# Altium PCB PCB1.PcbDoc
Units mm, origin at the board's own origin, x right, y up, seen from the top; angles counter-clockwise.
Board outline 55.5 x 74.04 mm, 2 copper layers (Top Layer, Bottom Layer), stack 1.571 mm thick; 29 components, 50 nets, 134 pads, 18 vias.
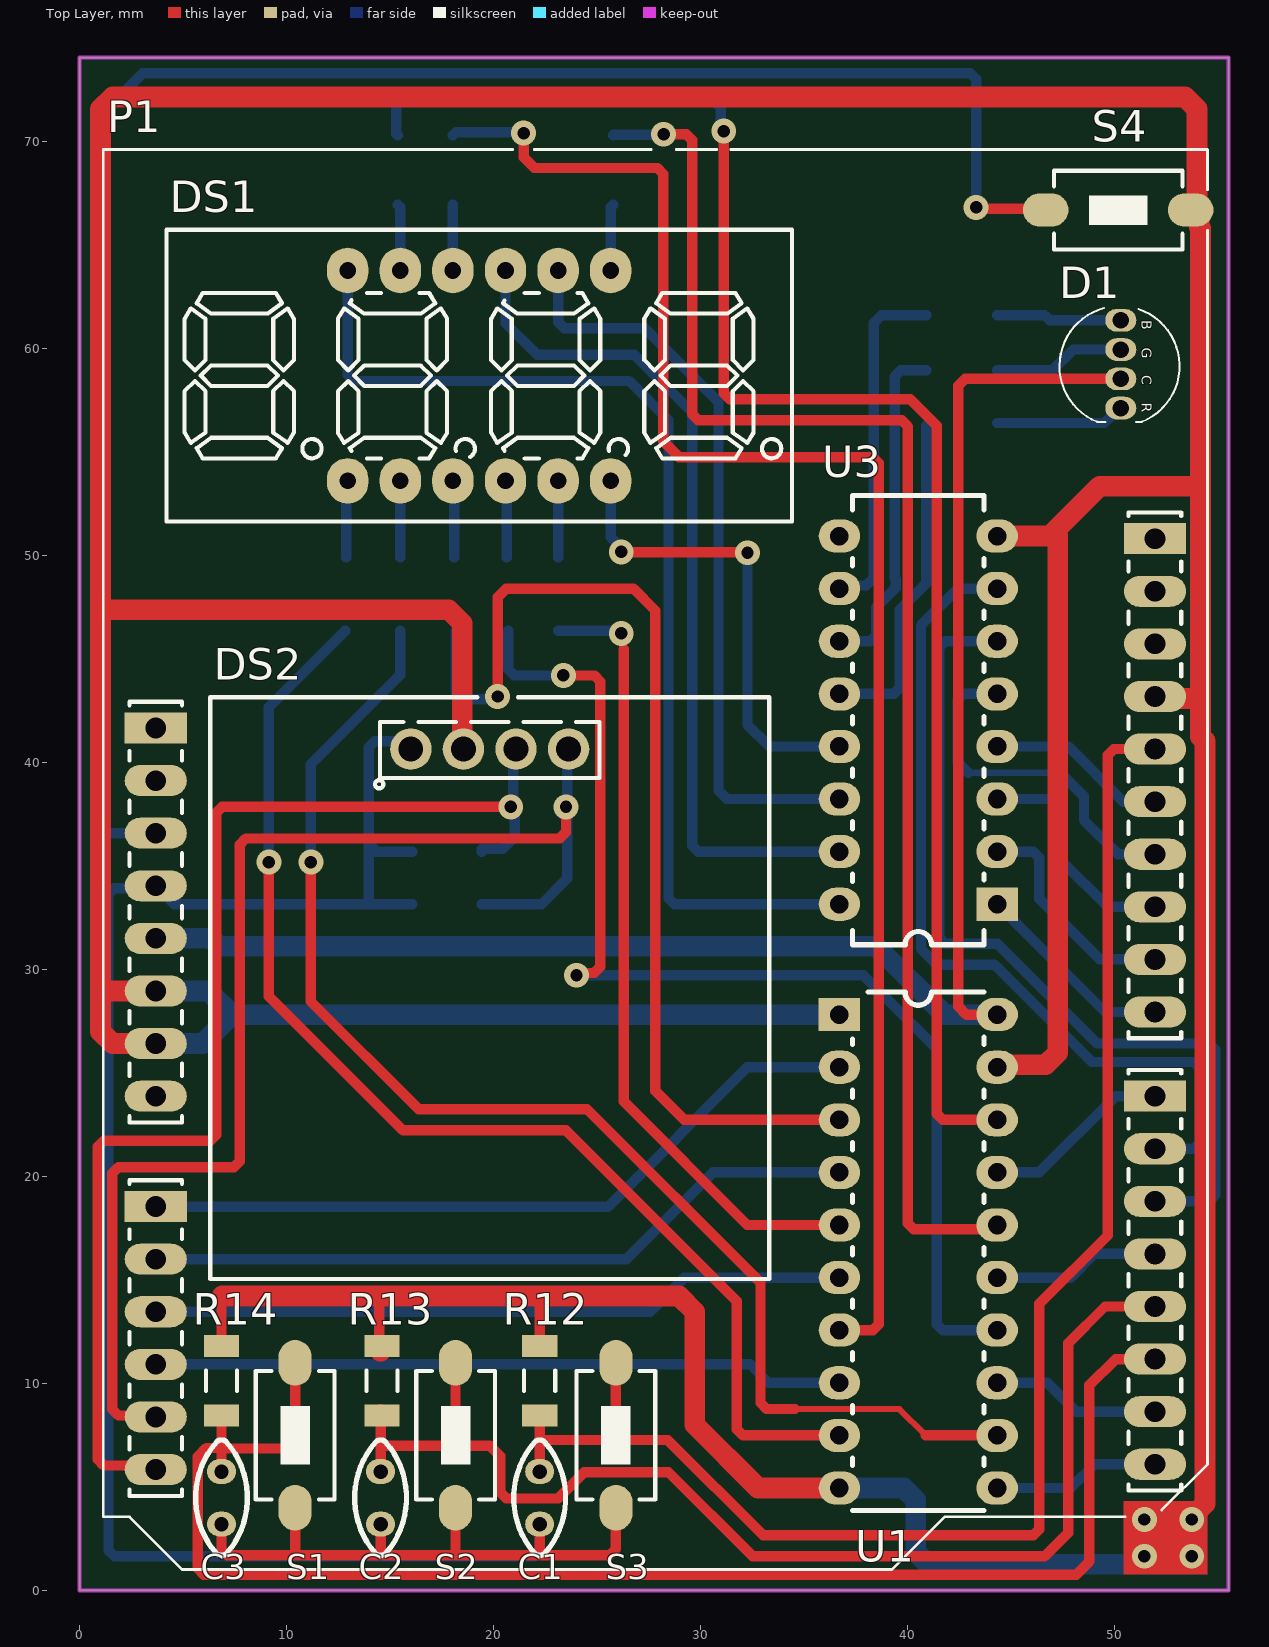
[diagram p0: Top Layer view]
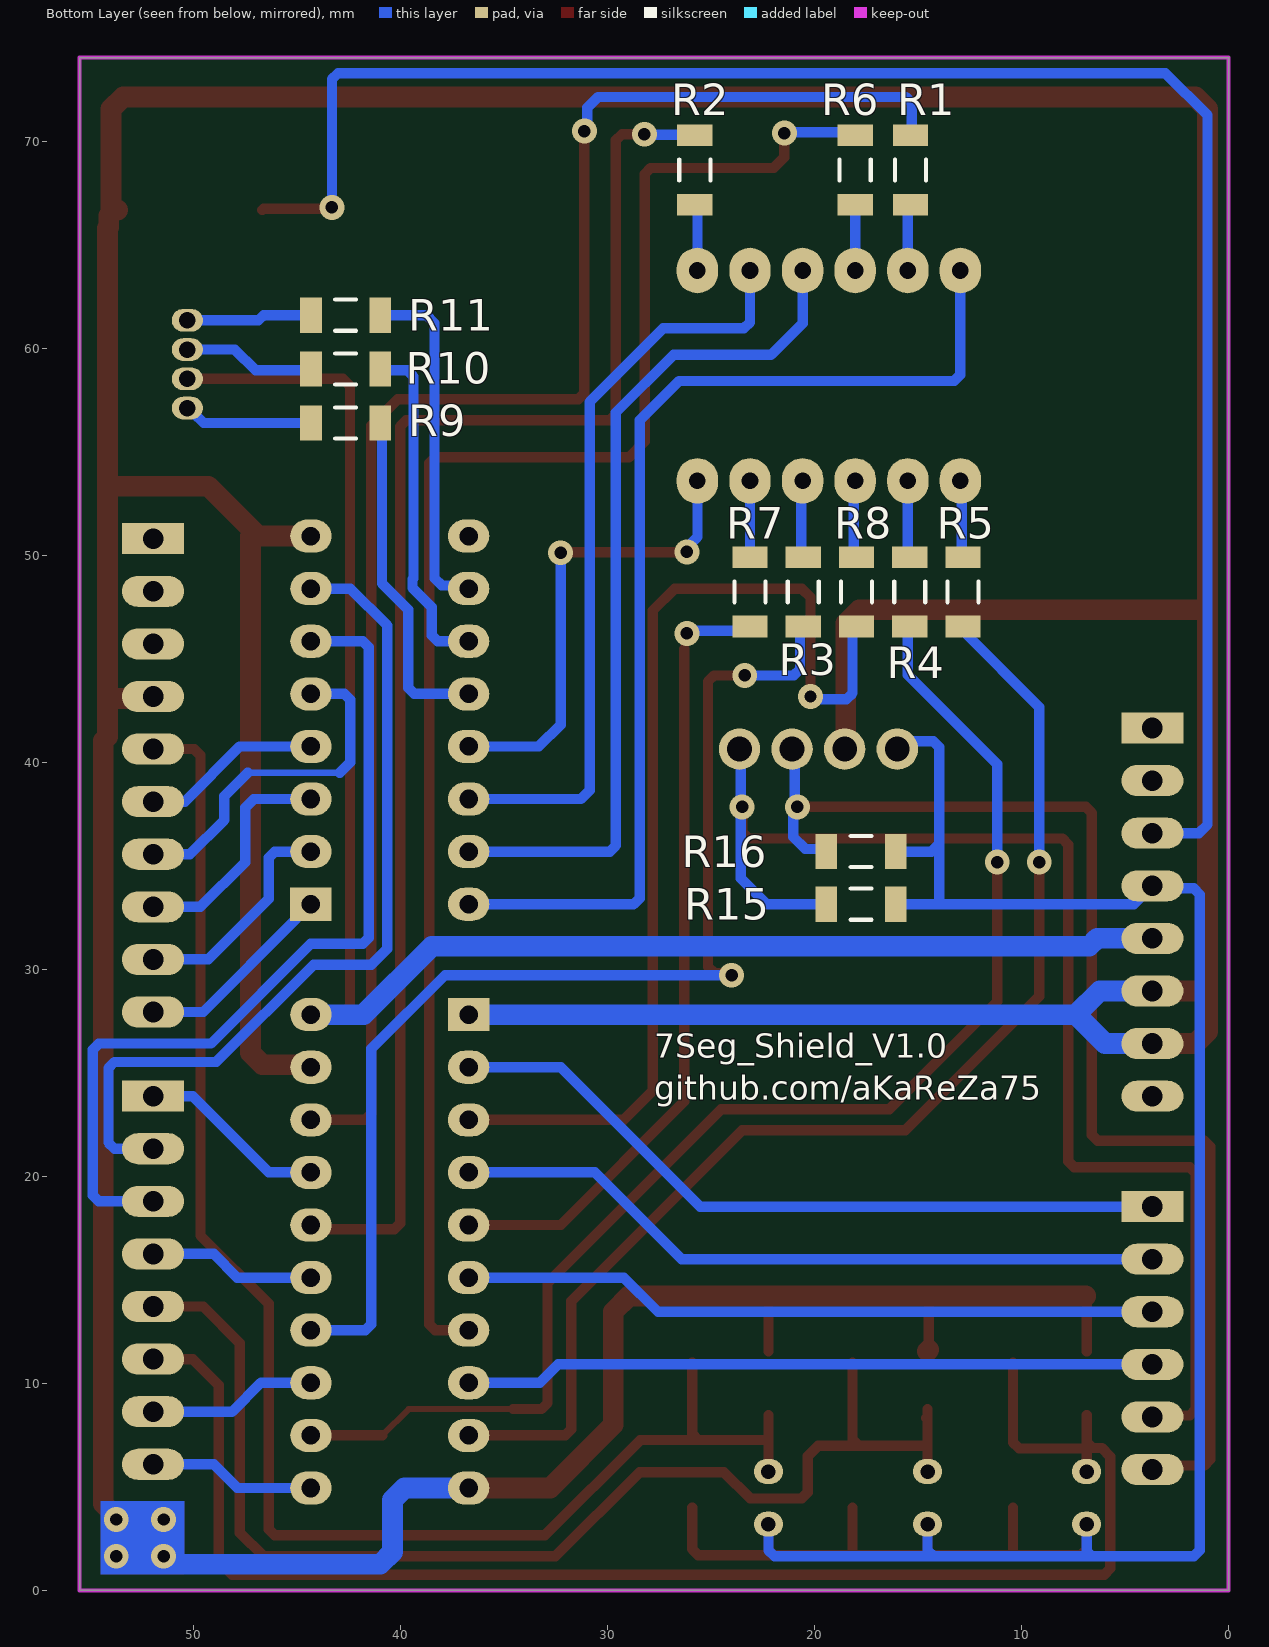
[diagram p1: Bottom Layer view, seen from below]

## Layer stack, top to bottom
Top Solder: solder mask 0.0102, Solder Resist, Dk 3.5
Top Layer: signal copper 0.0356
Dielectric 1: dielectric 1.5, FR-4, Dk 4.8
Bottom Layer: signal copper 0.0356
Bottom Solder: solder mask 0.0102, Solder Resist, Dk 3.5

## Board outline
0,0 55.499,0 55.499,74.041 0,74.041

## Design rules (kind name [scope] priority, off if disabled: settings)
AcuteAngle [All] p1: minimum=6.00000000000000E+0001 checktracksonly=TRUE
AssemblyTestPointUsage [All] p1 off:
AssemblyTestpoint [All] p1 off: testpointundercomponent=TRUE minsize=1.016 maxsize=2.54 preferedsize=1.524 minholesize=0 maxholesize=1.016 preferedholesize=0.813 testpointgrid=0.025 usegrid=TRUE gridtolerance=0 allowsidetop=TRUE allowsidebottom=TRUE
BoardOutlineClearance [All] p1: gap=0.2 ignorepadtopadclearanceinfootprint=FALSE
Clearance Poly_Clearance [All vs InPolygon] p1: gap=0.25 ignorepadtopadclearanceinfootprint=TRUE except(0.3: Arc-Hole Track-Hole SMDPad-Hole THPad-Hole Via-Hole Fill-Hole Poly-Hole Region-Hole Text-Hole)
Clearance [All] p2: gap=0.2 ignorepadtopadclearanceinfootprint=FALSE except(0.3: Arc-Hole Track-Hole SMDPad-Hole THPad-Hole Via-Hole Fill-Hole Poly-Hole Region-Hole Text-Hole)
FabricationTestPointUsage [All] p1 off: valid=0 allowmultiple=FALSE
FabricationTestpoint [All] p1 off: side=3 testpointundercomponent=TRUE minsize=1.016 maxsize=2.54 preferedsize=1.524 minholesize=0 maxholesize=1.016 preferedholesize=0.813 testpointgrid=0.025 allowsidetop=TRUE allowsidebottom=TRUE usegrid=TRUE gridtolerance=0
HoleSize [All] p1: absolutevalues=TRUE maxlimit=10 minlimit=0.4 maxpercent=80.000 minpercent=20.000
HoleToHoleClearance [All] p1: gap=0.3 allowstackedmicrovias=TRUE
MinimumAnnularRing [All] p1: minimumring=0.15
MinimumSolderMaskSliver [All] p1: minsoldermaskwidth=0.01
PolygonConnect [All] p1: thpad.connectstyle=Relief thpad.reliefconductorwidth=0.4 thpad.reliefentries=4 thpad.polygonreliefangle="90 Angle" thpad.airgapwidth=0.4 smdpad.connectstyle=Relief smdpad.reliefconductorwidth=0.4 smdpad.reliefentries=4 smdpad.polygonreliefangle="90 Angle" smdpad.airgapwidth=0.4 via.connectstyle=Direct via.reliefconductorwidth=0.254 via.reliefentries=4 via.polygonreliefangle="90 Angle" via.airgapwidth=0.254
RoutingVias [All] p1: holewidth=0.4 width=0.7 viastyle="Through Hole" minholewidth=0.4 minwidth=0.7 maxholewidth=3 maxwidth=6
SilkToSilkClearance [All] p1: silktosilkclearance=0
SilkToSolderMaskClearance [IsPad] p1: minsilkscreentomaskgap=0.01 clearancetoexposedcopper=TRUE
SolderMaskExpansion [All] p1: expansion=0.102 istentingtop=FALSE
Width [All] p1: maxlimit=10 minlimit=0.2 preferedwidth=0.3
21 further rules are at their usual default settings.

## Components (designator, comment, footprint, x,y, rotation, side; value= is the part's Value field where it differs from the comment)
C1 "100n" "Cap - 100nF" 22.225,4.475 r90 top
C2 "100n" "Cap - 100nF" 14.541,4.475 r90 top
C3 "100n" "Cap - 100nF" 6.858,4.475 r90 top
D1 "RGB" RGB_DIP 50.241,59.242 r270 top
DS1 "4Digit, Red" 7Seg-MPX4-30.2x14.1mm 19.304,58.674 r0 top
DS2 "SSD1306" OLED_SSD1306_64_I2C 19.812,40.64 r0 top
P1 "UNO" Arduino_uno_S_3 27.432,33.02 r0 top locked
R1 "470b" "RES 1206 (3216X08L)" 15.367,67.31 r90 bottom
R2 "470b" "RES 1206 (3216X08L)" 25.781,67.31 r90 bottom
R3 "470b" "RES 1206 (3216X08L)" 20.542,49.53 r270 bottom
R4 "470b" "RES 1206 (3216X08L)" 15.399,49.53 r270 bottom
R5 "470b" "RES 1206 (3216X08L)" 12.827,49.53 r270 bottom
R6 "470b" "RES 1206 (3216X08L)" 18.034,67.31 r90 bottom
R7 "470b" "RES 1206 (3216X08L)" 23.114,49.53 r270 bottom
R8 "470b" "RES 1206 (3216X08L)" 17.97,49.53 r270 bottom
R9 "470b" "RES 1206 (3216X08L)" 43.945,56.388 r180 bottom
R10 "470b" "RES 1206 (3216X08L)" 43.945,58.991 r180 bottom
R11 "470b" "RES 1206 (3216X08L)" 43.945,61.595 r180 bottom
R12 "4.7K" "RES 1206 (3216X08L)" 22.225,11.43 r270 top
R13 "4.7K" "RES 1206 (3216X08L)" 14.605,11.43 r270 top
R14 "4.7K" "RES 1206 (3216X08L)" 6.858,11.43 r270 top
R15 "4.7K" "RES 1206 (3216X08L)" 19.05,33.147 r180 bottom
R16 "4.7K" "RES 1206 (3216X08L)" 19.05,35.687 r180 bottom
S1 "PB" SW_PB_SMD_2PIN_SPST_6X3X2 10.414,7.493 r90 top
S2 "PB" SW_PB_SMD_2PIN_SPST_6X3X2 18.161,7.493 r90 top
S3 "PB" SW_PB_SMD_2PIN_SPST_6X3X2 25.908,7.493 r90 top
S4 "PB" SW_PB_SMD_2PIN_SPST_6X3X2 50.165,66.675 r180 top
U1 "74HCT244" PDIP20 40.513,16.383 r0 top
U3 "ULN2003" CDIP16 40.513,42.037 r180 top

## Footprints (in the part's own frame and the unit in brackets; to place one, negate y for a bottom-side part, rotate by r counter-clockwise, add the part's x,y. Pads: shape width x height; smd on the part's side, far side on the other; paste and mask are expansions set on the pad)
7Seg-MPX4-30.2x14.1mm [mm] "Display, 12-Leads, Body 30/2x14/1mm"
  oval 2x2.2 hole 0.8: 1(-6.35,-5.08) 2(-3.81,-5.08) 3(-1.27,-5.08) 4(1.27,-5.08) 5(3.81,-5.08) 6(6.35,-5.08) 7(6.35,5.08) 8(3.81,5.08) 9(1.27,5.08) 10(-1.27,5.08) 11(-3.81,5.08) 12(-6.35,5.08)
  silkscreen extent -15.1,-7.05 15.1,7.05, body extent -15,-7 15,7, height 7.1
Arduino_uno_S_3 [mm]
  rect 3x1.5 hole 1: 1(-23.749,8.636) 9(-23.749,-14.478) 22(24.511,-9.144) 32(24.511,17.78)
  oval 3x1.5 hole 1: 2(-23.749,6.096) 3(-23.749,3.556) 4(-23.749,1.016) 5(-23.749,-1.524) 6(-23.749,-4.064) 7(-23.749,-6.604) 8(-23.749,-9.144) 10(-23.749,-17.018) 11(-23.749,-19.558) 12(-23.749,-22.098) 13(-23.749,-24.638) 14(-23.749,-27.178) 15(24.511,-26.924) 16(24.511,-24.384) 17(24.511,-21.844) 18(24.511,-19.304) 19(24.511,-16.764) 20(24.511,-14.224) 21(24.511,-11.684) 23(24.511,-5.08) 24(24.511,-2.54) 25(24.511,0) 26(24.511,2.54) 27(24.511,5.08) 28(24.511,7.62) 29(24.511,10.16) 30(24.511,12.7) 31(24.511,15.24)
  silkscreen extent -26.29,-32 27.05,36.58, body extent -25.02,-28.31 25.78,19.05, height 8.51
"Cap - 100nF" [mm]
  oval 1.2x1.4 hole 0.7: 1(-1.27,0) 2(1.27,0)
  silkscreen extent -2.78,-1.25 2.79,1.25, body extent -2.92,-0.86 2.92,0.83, height 6.92
CDIP16 [mm] "16-Pin Ceramic DIP (DD16) NARROW_(300mil width) - 100mil pitch"
  rect 2x1.6 hole 0.9: 1(-3.81,8.89)
  oval 2x1.6 hole 0.9: 2(-3.81,6.35) 3(-3.81,3.81) 4(-3.81,1.27) 5(-3.81,-1.27) 6(-3.81,-3.81) 7(-3.81,-6.35) 8(-3.81,-8.89) 9(3.81,-8.89) 10(3.81,-6.35) 11(3.81,-3.81) 12(3.81,-1.27) 13(3.81,1.27) 14(3.81,3.81) 15(3.81,6.35) 16(3.81,8.89)
  silkscreen extent -3.18,-10.85 3.18,10.85, body extent -3.93,-10.79 3.94,10.79, height 4
OLED_SSD1306_64_I2C [mm] "OLED SS1306 Breakout, 128X64, I2C"
  round 2 hole 1.2 mask+0.1: 1(-3.81,0) 2(-1.27,0) 3(1.27,0) 4(3.81,0)
  silkscreen extent -13.5,-25.6 13.5,2.5, body extent -13.35,-25.5 13.35,2.36, height 13.97
PDIP20 [mm] "20-Pin Plastic DIP (DD20) NARROW_(300mil width) - 100mil pitch"
  rect 2x1.6 hole 0.9: 1(-3.81,11.43)
  oval 2x1.6 hole 0.9: 2(-3.81,8.89) 3(-3.81,6.35) 4(-3.81,3.81) 5(-3.81,1.27) 6(-3.81,-1.27) 7(-3.81,-3.81) 8(-3.81,-6.35) 9(-3.81,-8.89) 10(-3.81,-11.43) 11(3.81,-11.43) 12(3.81,-8.89) 13(3.81,-6.35) 14(3.81,-3.81) 15(3.81,-1.27) 16(3.81,1.27) 17(3.81,3.81) 18(3.81,6.35) 19(3.81,8.89) 20(3.81,11.43)
  silkscreen extent -3.17,-12.52 3.17,12.52, body extent -3.94,-12.51 3.94,12.51, height 3.76
"RES 1206 (3216X08L)" [mm] "Chip Resistor, 2-Leads, Body 3.2x1.6mm, IPC High Density _ (0.125 W)"
  rect 1.05x1.7 smd: 1(-0.377,0) 2(2.973,0)
  silkscreen extent 0.8,-0.75 1.8,0.75, body extent -0.23,-0.76 2.82,0.76, height 0.6
RGB_DIP [mm]
  oval 1.1x1.5 hole 0.8: 1(2.134,0.051) 2(0.72,0.051) 3(-0.694,0.051) 4(-2.108,0.051)
  silkscreen extent -2.7,-2.91 2.8,2.89, body extent -3,-3 2.6,3, height 8.09
SW_PB_SMD_2PIN_SPST_6X3X2 [mm] "SWITCH, PUSHBUTTON, SMD, SPST, 6X3.5X2.5mm, RS-282G05A3, SKQYPA, 50000 Cycles"
  oval 2.2x1.6 smd mask+0.1: 1(-3.5,0) 2(3.5,0)
  silkscreen extent -3.1,-1.9 3.1,1.9, body extent -3.4,-1.86 3.4,1.86, height 2.5

## Part data
C1 C2 C3: library part Cap_Multi_THT, "Multi layer capacitor", Package=Package?, Rating=Rating?, Inflow=inflow?, Type=Type?, Validation=Valid
D1: library part Semi_LED_RGB_THT, "SMD 5050 LED RGB and Other", Package=Dip, Rating=5V, Inflow=5139, Type=CA, Validation=Valid
DS1: library part ModSen_7Seg_MPX4_CC, "7Segment-MPX4-CC", Package=Package?, Rating=Rating?, Inflow=8128, Type=Type?
DS2: library part ModSen_LCD_Oled_0.96_2, "Oled Display", Package=0.96, Rating=128x64, Inflow=inflow?, Type=OLED, Validation=Valid
P1: library part Con_Arduino_UNO_S, "Arduino uno slave", Package=Package?, Rating=Rating?, Inflow=inflow?, Type=Type?
R1 R2 R3 R4 R5 R6 R7 R8 R9 R10 R11 R12 R13 R14 R15 R16: library part Res_SMD_1206, "Resistor", Package=1206, Rating=0.25W, Inflow=inflow?, Type=10%, Validation=Valid
S1 S2 S3 S4: library part SW_PushButton_2_SMD, "SMT Tactile ‎Switch", Package=SMD, Rating=2b, Inflow=8260, Type=Vertical
U1: library part IC_Logic_74HCT244, "Octal Bus Buffer with 3 State Outputs (Non Inverted)", Package=Dip, Rating=8b, Inflow=1118, Type="3-State Non-Inverting"
U3: library part IC_Driver_ULN2003, "Seven darlington array drivers", Package=SO-16, Rating=Rating?, Inflow=1506, Type=Driver, Validation=Valid

## Via types
v1: diameter 1.2, hole 0.6, Top Layer to Bottom Layer, 18 vias

## Nets (pads, with @x,y where several pads share a name; then routed paths per layer and width w, separated by ;. In a path a pad name is that pad's centre, name@x,y a point inside that pad or via, vN(x,y) a via of type N, cw(c..) or ccw(c..) an arc to the next point about the centre after c; other vN are vias at no path point)
+3.3: C1.1 C2.1 C3.1 DS2.1 P1.4 R15.2 R16.2 S1.1 S2.1 S3.1 | length 114.8
  Top Layer w0.5: C3.1@6.858,3.175 6.858,2.002 7.151,1.709 10.287,1.709 ; S1.1 10.414,1.836 10.287,1.709 ; C2.1@14.541,3.175 14.541,1.773 14.478,1.709 ; S2.1 18.161,1.836 18.034,1.709 ; C1.1@22.225,3.175 22.225,1.963 21.971,1.709 ; S3.1 25.908,2.002 25.615,1.709 21.971,1.709 ; 10.287,1.709 14.478,1.709 ; 14.478,1.709 18.034,1.709 ; 18.034,1.709 21.971,1.709
  Bottom Layer w0.5: P1.4@3.683,33.909 1.69,33.909 1.397,33.616 1.397,1.944 1.69,1.651 6.604,1.651 ; P1.4 4.572,33.147 13.97,33.147 ; C3.1@6.858,3.175 6.858,1.905 6.604,1.651 ; C2.1@14.541,3.175 14.541,1.944 14.249,1.651 ; DS2.1 16.002,40.788 15.945,40.845 15.769,41.021 14.263,41.021 13.97,40.728 13.97,36.076 ; R15.2 14.553,33.147 14.097,33.147 13.97,33.274 13.97,36.076 ; R16.2 14.359,35.687 13.97,36.076 ; C1.1@22.225,3.175 22.225,1.944 21.932,1.651 14.249,1.651 ; 6.604,1.651 14.249,1.651
+5: D1.2 P1.5 U1.20 | length 82.2
  Top Layer w0.5: U1.20 42.838,27.813 42.438,28.213 42.438,58.186 42.774,58.522 D1.2
  Bottom Layer w1: P1.5 6.35,31.496 6.731,31.115 38.481,31.115 41.783,27.813 U1.20
Digit1: P1.23 U3.1 | length 9.9
  Bottom Layer w0.5: U3.1 44.498,33.147 45.048,32.597 45.048,32.422 49.53,27.94 P1.23
Digit2: P1.24 U3.2 | length 10.9
  Bottom Layer w0.5: U3.2 46.062,35.687 46.355,35.394 46.355,33.401 49.276,30.48 P1.24
Digit3: P1.25 U3.3 | length 11.3
  Bottom Layer w0.5: U3.3 47.078,38.227 47.498,37.807 47.498,35.179 49.657,33.02 P1.25
Digit4: P1.27 U3.4 | length 8.7
  Bottom Layer w0.5: U3.4 47.752,40.767 50.419,38.1 P1.27
GND: DS2.2 P1.6 P1.7 P1.29 R12.1 R13.1 R14.1 S4.1 U1.1 U1.10 U1.19 U3.8 | length 342.1
  Top Layer w0.5: R14.1@6.858,11.56 6.858,14.185 ; R13.1@14.478,11.623 14.478,13.97 ; R12.1@22.225,11.56 22.225,14.224
  Top Layer w1: P1.7 1.602,26.416 1.016,27.002 1.016,28.663 ; P1.6 1.309,28.956 1.016,28.663 ; 6.897,14.224 22.225,14.224 28.956,14.224 29.718,13.462 29.718,8.001 32.766,4.953 U1.10 ; R13.1@14.478,11.623 R13.1@14.541,11.56 ; DS2.2@18.485,40.845 18.485,46.715 17.829,47.371 1.016,47.371 ; U1.19 44.438,25.388 46.658,25.388 47.244,25.974 47.244,50.927 46.863,50.927 ; U3.8 46.863,50.927 ; P1.29 52.039,43.084 53.975,43.084 ; S4.1 53.803,66.675 54.08,66.398 54.08,65.852 54.143,65.789 54.143,43.084 54.143,41.241 54.356,41.028 54.356,4.191 53.721,3.556 v1(53.721,3.429) ; v1@53.848,1.651 53.975,1.778 v1@53.975,3.429 ; 53.975,53.34 49.276,53.34 46.863,50.927 ; S4.1@53.975,66.675 53.975,71.55 53.389,72.136 1.602,72.136 1.016,71.55 1.016,47.371 ; 1.016,28.663 1.016,47.371
  Bottom Layer w1: P1.7 5.969,26.416 7.366,27.813 ; P1.6 6.223,28.956 7.366,27.813 ; U1.10 39.8,4.953 40.386,4.367 40.386,1.856 40.972,1.27 50.927,1.27 v1@51.435,1.778 ; U1.1 7.366,27.813 ; v1@51.435,1.524 53.721,1.524 v1@53.975,1.778
  other v1: 51.435,1.651 53.721,1.651 51.435,3.429
NetD1_1: D1.1 R9.1 | length 6.3
  Bottom Layer w0.5: R9.1 49.499,56.388 49.946,56.835 49.946,56.877 50.177,57.108 D1.1
NetD1_3: D1.3 R10.1 | length 6.4
  Bottom Layer w0.5: R10.1@44.322,58.928 46.99,58.928 47.998,59.936 D1.3
NetD1_4: D1.4 R11.1 | length 6.1
  Bottom Layer w0.5: R11.1 46.609,61.595 46.854,61.35 D1.4
NetDS1_1: DS1.1 R5.1 | length 3.7
  Bottom Layer w0.5: R5.1@12.89,49.907 12.89,53.53 DS1.1
NetDS1_2: DS1.2 R4.1 | length 3.7
  Bottom Layer w0.5: R4.1@15.494,49.911 DS1.2
NetDS1_3: DS1.3 R8.1 | length 3.7
  Bottom Layer w0.5: DS1.3 18.098,53.53 R8.1@18.098,49.911
NetDS1_4: DS1.4 R3.1 | length 3.7
  Bottom Layer w0.5: DS1.4 20.637,53.53 R3.1@20.637,49.907
NetDS1_5: DS1.5 R7.1 | length 3.7
  Bottom Layer w0.5: R7.1 DS1.5
NetDS1_6: DS1.6 U3.13 | length 22.9
  Top Layer w0.5: v1(26.162,50.165) 26.184,50.143 32.24,50.143 v1(32.262,50.12)
  Bottom Layer w0.5: DS1.6 25.654,50.881 26.162,50.373 v1(26.162,50.165) ; v1(32.262,50.12) 32.262,41.818 33.313,40.767 U3.13
NetDS1_7: DS1.7 R2.1 | length 3.2
  Bottom Layer w0.5: DS1.7 25.654,66.806 R2.1
NetDS1_8: DS1.8 U3.14 | length 36.6
  Bottom Layer w0.5: DS1.8 23.114,61.253 23.407,60.96 27.305,60.96 30.861,57.404 30.861,38.647 31.281,38.227 U3.14
NetDS1_9: DS1.9 U3.15 | length 41.5
  Bottom Layer w0.5: DS1.9 20.574,61.214 22.098,59.69 26.797,59.69 29.591,56.896 29.591,35.98 29.884,35.687 U3.15
NetDS1_10: DS1.10 R6.1 | length 3.2
  Bottom Layer w0.5: DS1.10 R6.1
NetDS1_11: DS1.11 R1.1 | length 3.2
  Bottom Layer w0.5: R1.1 15.494,66.806 DS1.11
NetDS1_12: DS1.12 U3.16 | length 52.9
  Bottom Layer w0.5: DS1.12 12.954,58.713 13.247,58.42 26.543,58.42 28.448,56.515 28.448,33.44 28.741,33.147 U3.16
NetR1_2: R1.2 U1.18 | length 78.7
  Top Layer w0.5: v1(31.115,70.485) 31.115,57.824 31.408,57.531 40.132,57.531 41.402,56.261 41.402,23.026 41.695,22.733 U1.18
  Bottom Layer w0.5: R1.2 15.305,70.345 15.305,71.843 15.598,72.136 30.454,72.136 30.968,71.622 30.968,70.632 v1(31.115,70.485)
NetR2_2: R2.2 U1.16 | length 70.9
  Top Layer w0.5: v1(28.213,70.331) 29.298,70.331 29.591,70.038 29.591,56.808 29.884,56.515 39.712,56.515 40.005,56.222 40.005,17.735 40.298,17.443 44.113,17.443 U1.16
  Bottom Layer w0.5: R2.2 25.805,70.307 28.189,70.307 v1(28.213,70.331)
NetR3_2: R3.2 U1.14 | length 56.9
  Top Layer w0.5: v1(23.368,44.196) 24.853,44.196 25.146,43.903 25.146,30.119 24.853,29.827 24.112,29.827 v1(24.003,29.718)
  Bottom Layer w0.5: R3.2@20.701,46.352 20.701,44.489 20.994,44.196 v1(23.368,44.196) ; v1(24.003,29.718) 37.846,29.718 41.402,26.162 41.402,12.866 41.695,12.573 U1.14
NetR4_2: R4.2 U1.12 | length 64.9
  Top Layer w0.3: 34.544,8.763 39.603,8.763 40.873,7.493
  Top Layer w0.5: v1@11.176,35.433 11.176,28.448 16.383,23.241 24.511,23.241 32.893,14.859 32.893,9.056 33.186,8.763 34.544,8.763 ; 40.873,7.493 U1.12
  Bottom Layer w0.5: v1@11.176,35.433 11.176,39.902 15.494,44.22 R4.2@15.494,46.352
  other v1: 11.176,35.179
NetR5_2: R5.2 U1.9 | length 59.1
  Top Layer w0.5: v1@9.144,35.052 9.144,28.702 15.621,22.225 23.495,22.225 31.75,13.97 31.75,7.786 32.043,7.493 U1.9
  Bottom Layer w0.5: v1@9.144,35.052 9.144,42.669 R5.2@12.827,46.352
  other v1: 9.144,35.179
NetR6_2: R6.2 U1.7 | length 79.1
  Top Layer w0.5: v1(21.451,70.39) 21.463,70.379 21.463,69.215 21.971,68.707 27.901,68.707 28.194,68.414 28.194,55.499 28.956,54.737 38.315,54.737 38.608,54.444 38.608,12.866 38.315,12.573 U1.7
  Bottom Layer w0.5: R6.2 18.19,70.439 21.402,70.439 v1(21.451,70.39)
NetR7_2: R7.2 U1.5 | length 37.8
  Top Layer w0.5: 26.289,45.466 26.289,23.622 32.258,17.653 U1.5
  Bottom Layer w0.5: R7.2@23.114,46.352 26.038,46.352 v1(26.162,46.228)
NetR8_2: R8.2 U1.3 | length 50.9
  Top Layer w0.5: v1(20.193,43.18) 20.193,47.967 20.613,48.387 26.758,48.387 27.813,47.332 27.813,24.13 29.21,22.733 U1.3
  Bottom Layer w0.5: R8.2@18.161,46.352 18.161,43.346 18.454,43.053 20.066,43.053 v1(20.193,43.18)
NetR9_2: R9.2 U3.12 | length 16.2
  Bottom Layer w0.5: U3.12 39.331,43.307 39.624,43.6 39.624,47.371 40.891,48.638 R9.2@40.891,56.261
NetR10_2: R10.2 U3.11 | length 16.4
  Bottom Layer w0.5: U3.11 38.188,45.847 38.481,46.14 38.481,47.498 39.417,48.434 39.417,48.848 39.37,48.895 39.37,58.635 39.663,58.928 R10.2@40.891,58.928
NetR11_2: R11.2 U3.10 | length 16.9
  Bottom Layer w0.5: U3.10 36.857,48.541 38,48.541 38.354,48.895 38.354,61.214 38.735,61.595 R11.2@40.891,61.595
RESET: P1.3 S4.2 | length 89.9
  Top Layer w0.5: v1(43.307,66.802) 43.37,66.739 46.601,66.739 S4.2
  Bottom Layer w0.5: P1.3 1.436,36.576 1.016,36.996 1.016,71.247 3.048,73.279 43.014,73.279 43.307,72.986 v1(43.307,66.802)
RGB_B: P1.21 U3.7 | length 41.8
  Bottom Layer w0.5: U3.7 42.418,48.387 40.64,46.609 40.64,30.988 41.402,30.226 44.196,30.226 48.895,25.527 53.809,25.527 54.102,25.234 54.102,21.634 53.809,21.341 51.948,21.341 P1.21
RGB_G: P1.20 U3.6 | length 42.6
  Bottom Layer w0.5: U3.6 41.822,45.847 41.529,45.554 41.529,31.535 41.822,31.242 44.323,31.242 49.149,26.416 54.571,26.416 54.864,26.123 54.864,19.089 54.571,18.796 P1.20
RGB_R: P1.26 U3.5 | length 17.1
  Bottom Layer w0.3: 42.926,39.497 47.371,39.497
  Bottom Layer w0.5: 42.926,39.497 42.418,40.005 42.418,43.014 42.711,43.307 U3.5 ; 47.371,39.497 48.514,38.354 48.514,37.211 50.165,35.56 P1.26
SCL: DS2.3 P1.14 R16.1 | length 60.2
  Top Layer w0.5: P1.14 3.492,6.033 1.182,6.033 0.889,6.326 0.889,21.424 1.182,21.717 6.311,21.717 6.604,22.01 6.604,37.553 6.897,37.846 v1(20.828,37.846)
  Bottom Layer w0.5: R16.1 19.427,35.814 20.447,35.814 21.025,36.392 21.025,37.846 20.955,37.916 20.955,40.513 DS2.3
SDA: DS2.4 P1.13 R15.1 | length 63.5
  Top Layer w0.5: P1.13 3.613,8.452 1.882,8.452 1.589,8.745 1.589,20.154 1.882,20.447 7.454,20.447 7.747,20.74 7.747,36.029 8.04,36.322 23.202,36.322 23.495,36.615 v1(23.495,37.846)
  Bottom Layer w0.5: R15.1 22.313,33.147 23.565,34.399 23.565,37.846 23.558,37.853 23.558,40.576 DS2.4
Seg1: P1.9 U1.2 | length 35.8
  Bottom Layer w0.5: P1.9 25.527,18.542 32.258,25.273 U1.2
Seg2: P1.10 U1.4 | length 34.8
  Bottom Layer w0.5: P1.10 26.416,16.002 30.607,20.193 U1.4
Seg3: P1.11 U1.6 | length 33.7
  Bottom Layer w0.5: P1.11 27.559,13.462 29.21,15.113 U1.6
Seg4: P1.12 U1.8 | length 33.4
  Bottom Layer w0.5: P1.12 32.385,10.922 33.274,10.033 U1.8
Seg5: P1.15 U1.11 | length 8.1
  Bottom Layer w0.5: U1.11 47.879,4.953 49.022,6.096 P1.15
Seg6: P1.16 U1.13 | length 8.2
  Bottom Layer w0.5: U1.13 46.736,10.033 48.133,8.636 P1.16
Seg7: P1.19 U1.15 | length 8.1
  Bottom Layer w0.5: U1.15 47.879,15.113 49.022,16.256 P1.19
Seg8: P1.22 U1.17 | length 9.1
  Bottom Layer w0.5: U1.17 46.355,20.193 50.038,23.876 P1.22
SW1: C3.2 P1.17 R14.2 S1.2 | length 72.2
  Top Layer w0.5: 6.696,7.02 6.56,6.884 6.132,6.884 5.715,6.467 5.715,3.647 5.708,3.64 5.708,1.062 6.008,0.762 48.133,0.762 48.768,1.397 48.768,9.906 50.038,11.176 P1.17 ; C3.2 6.858,6.858 10.121,6.858 10.414,7.151 S1.2 ; 6.858,7.182 R14.2
SW2: C2.2 P1.18 R13.2 S2.2 | length 59.3
  Top Layer w0.5: C2.2@14.541,5.775 14.541,7.112 ; R13.2@14.541,8.76 14.541,8.394 14.605,8.33 14.541,8.266 14.541,7.112 ; S2.2 18.161,7.278 17.868,6.985 ; P1.18 49.53,13.716 47.752,11.938 47.752,2.794 46.609,1.651 32.512,1.651 28.448,5.715 24.384,5.715 23.114,4.445 20.613,4.445 20.32,4.738 20.32,6.477 19.812,6.985 17.868,6.985 ; 14.541,7.112 14.668,6.985 17.868,6.985
SW3: C1.2 P1.28 R12.2 S3.2 | length 73.8
  Top Layer w0.5: C1.2@22.225,5.775 22.225,7.267 ; R12.2 22.225,7.267 ; S3.2 25.908,7.56 25.615,7.267 ; P1.28 49.95,40.64 49.657,40.347 49.657,17.145 46.355,13.843 46.355,2.96 46.062,2.667 33.02,2.667 28.42,7.267 25.615,7.267 ; 22.225,7.267 25.615,7.267
pads on no net: P1.1 P1.2 P1.8 P1.30 P1.31 P1.32 U3.9

## Keep-outs
Keep-Out Layer:
  the board outline again, w0.2

## Other copper
Top Layer:
  rectangle net GND: 50.419,0.762 54.483,4.318
Bottom Layer:
  rectangle net GND: 50.419,0.762 54.483,4.318

## Silkscreen, mask and mechanical layers (free items; w line width, h text height)
Bottom Overlay:
  text "7Seg_Shield_V1.0" at 27.74,25.341 h2
  text "github.com/aKaReZa75" at 27.74,23.309 h2

## Text inside footprints (layer, text, board x,y; h text height)
D1: Top Overlay "B" at 51.308,61.35 h0.5 r270; Top Overlay "G" at 51.308,60.021 h0.5 r270; Top Overlay "C" at 51.308,58.691 h0.5 r270; Top Overlay "R" at 51.308,57.362 h0.5 r270